# EAGLE board AT261ALDO_board (EAGLE 6.3)
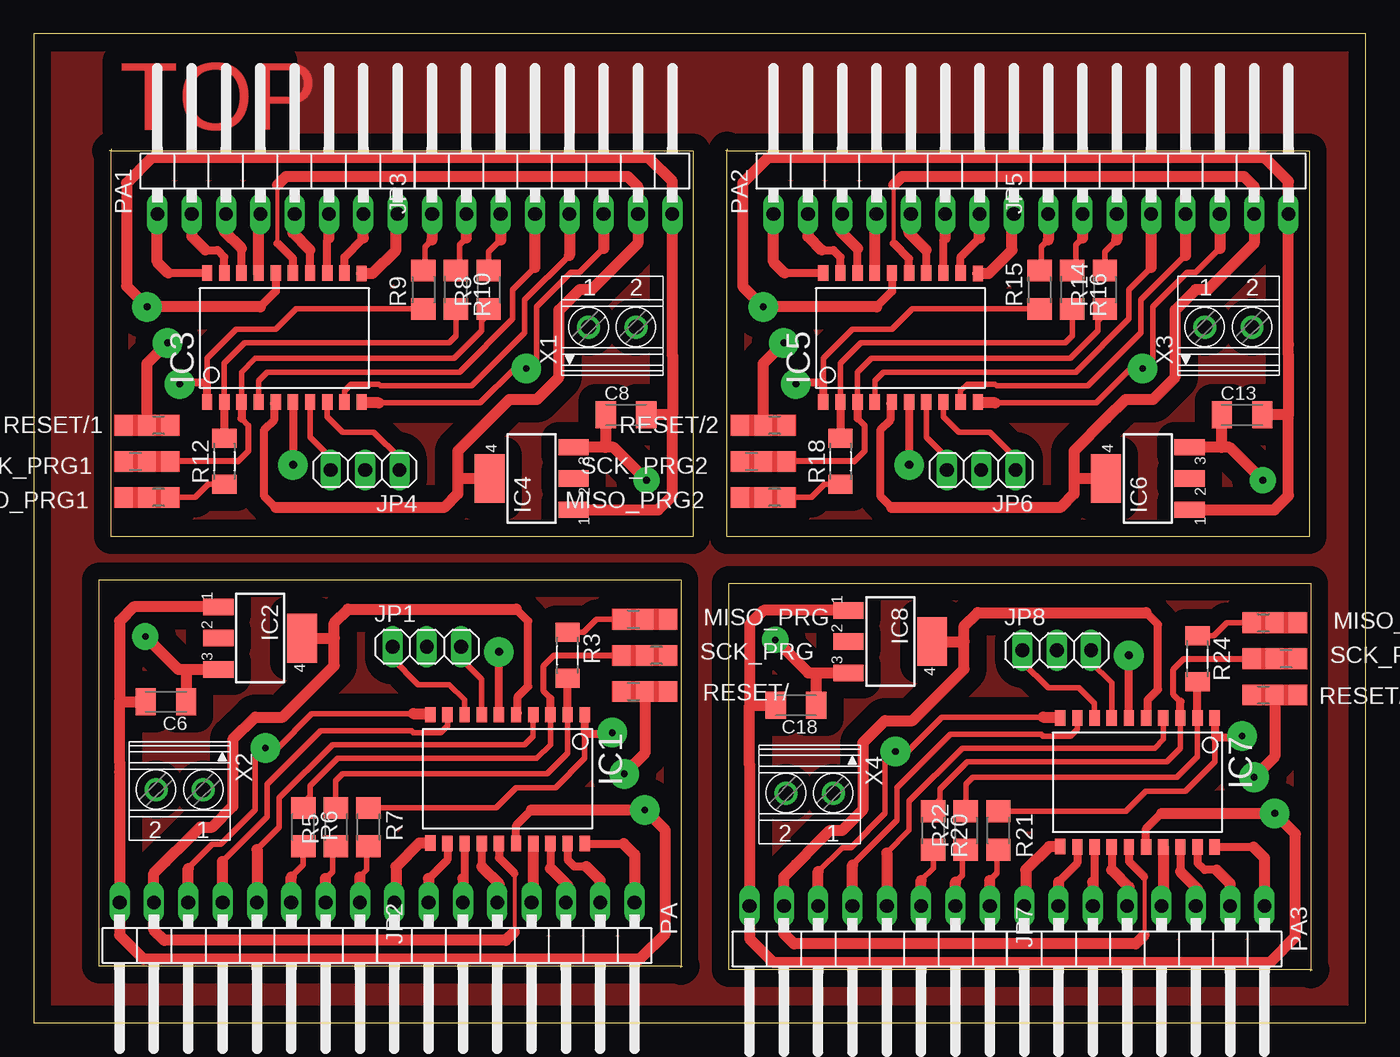
[diagram p0: board, top side]
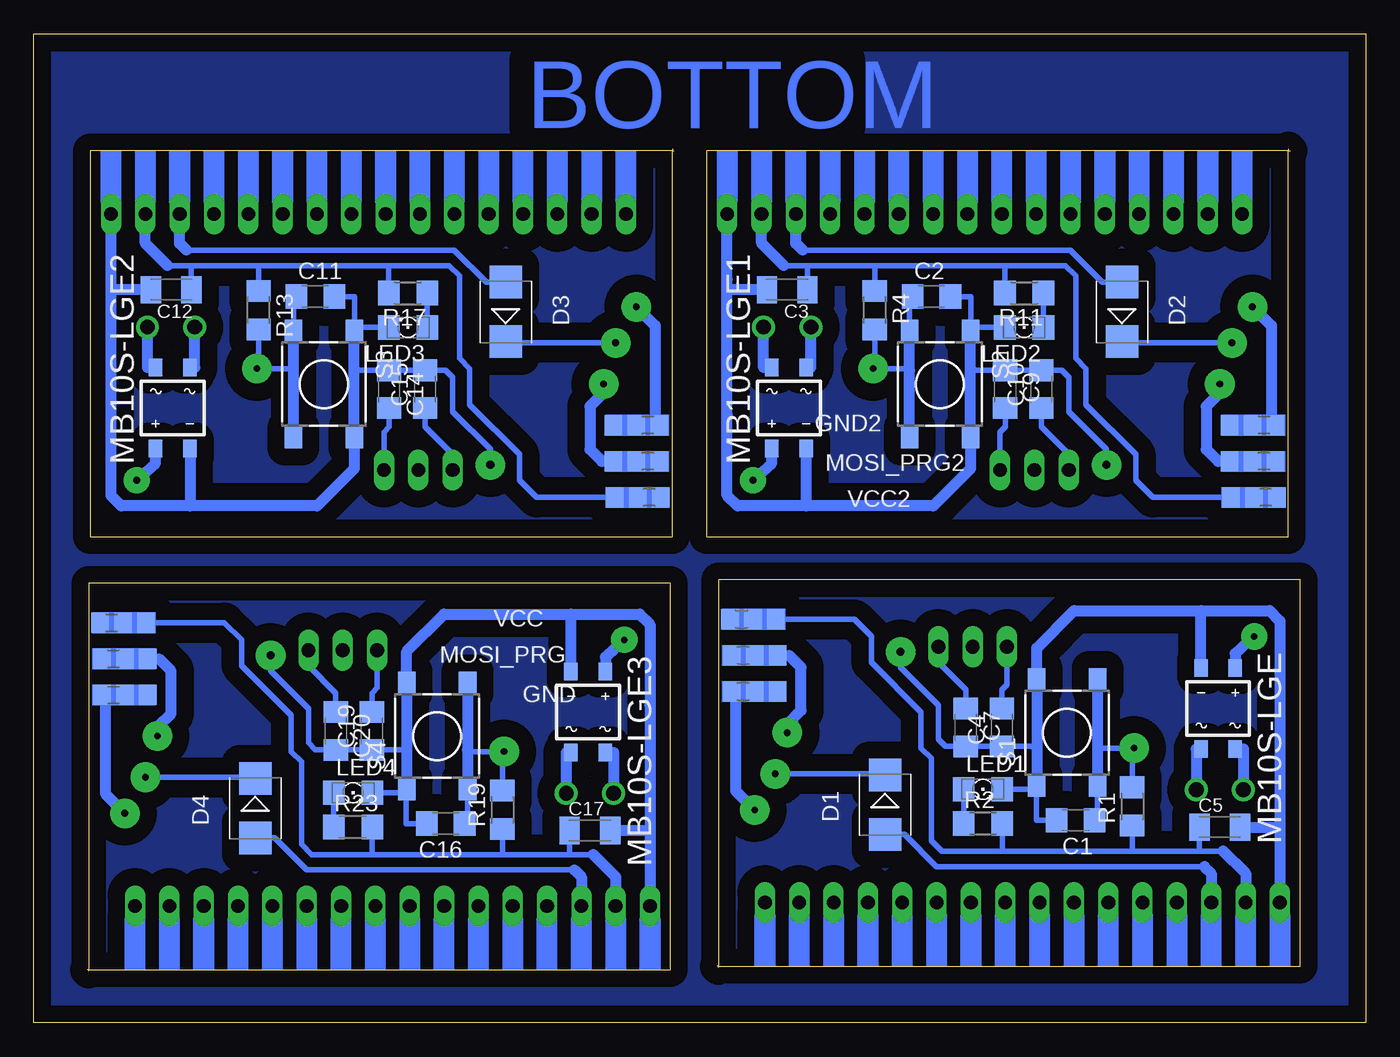
[diagram p1: board, bottom side, seen from below]

Size 98.55 x 73.15 mm. Coordinates in mm from the lower left corner, seen from the top.
Outline: 47.88,4.06 47.88,4.19
Outline: 47.88,4.19 4.83,4.19 4.83,32.77 47.88,32.77 47.88,4.19
Outline: 47.88,4.19 48.01,4.19
Outline: 5.71,64.64 5.71,64.52
Outline: 5.71,64.52 48.77,64.52 48.77,35.94 5.71,35.94 5.71,64.52
Outline: 5.71,64.52 5.59,64.52
Outline: 51.31,64.64 51.31,64.52
Outline: 51.31,64.52 94.36,64.52 94.36,35.94 51.31,35.94 51.31,64.52
Outline: 51.31,64.52 51.18,64.52
Outline: 94.49,3.81 94.49,3.94
Outline: 94.49,3.94 51.44,3.94 51.44,32.51 94.49,32.51 94.49,3.94
Outline: 94.49,3.94 94.61,3.94
Outline: 0,0 98.55,0 98.55,73.15 0,73.15 0,0
Copper layers (1*16): Top 0.035mm / dielectric 1.5mm / Bottom 0.035mm
Design rules "default": minimum track width 10mil, minimum drill 24mil, track to track 8mil, track to pad 8mil, pad to pad 8mil, via to via 8mil, smd to smd 8mil, copper to edge 40mil, drill to drill 8mil, minimum pad ring 10mil, minimum via ring 8mil, stop-mask expansion 4mil, vias tented up to drill 0mil, thermal gap 10mil

## Footprints (pad centres in the part's own frame; a part is rotated, then mirrored left to right if it is on the bottom)
C1206 = smd 1.6 x 1.8: 1 -1.4,0; 2 1.4,0
C1206K = smd 1.5 x 2: 1 -1.5,0; 2 1.5,0
SMB = smd 2.4 x 2.4: A 2.2,0; C -2.2,0
A0R-JMP = smd 1.5 x 1.3: 1 0,1.7; 2 0,0; 3 0,-1.7
SO20L = smd 0.762 x 1.143: 1 -5.08,-5.131; 2 -3.81,-5.131; 3 -2.54,-5.131; 4 -1.27,-5.131; 5 0,-5.131; 6 1.27,-5.131; 7 2.54,-5.131; 8 3.81,-5.131; 9 5.08,-5.131; 10 6.35,-5.131; 11 6.35,4.369; 12 5.08,4.394; 13 3.81,4.394; 14 2.54,4.394; 15 1.27,4.394; 16 0,4.394; 17 -1.27,4.394; 18 -2.54,4.394; 19 -3.81,4.394; 20 -5.08,4.394
SOT223 = smd 1.219 x 2.235: 1 -2.311,-3.099; 2 0,-3.099; 3 2.311,-3.099 | smd 3.6 x 2.2: 4 0,3.099
1X03 = drill 1.016 long: 1 -2.54,0; 2 0,0; 3 2.54,0
1X08/90 = drill 1.016 long: 1 -8.89,-3.81; 2 -6.35,-3.81; 3 -3.81,-3.81; 4 -1.27,-3.81; 5 1.27,-3.81; 6 3.81,-3.81; 7 6.35,-3.81; 8 8.89,-3.81
1206 = smd 1.6 x 1.803: A -1.422,0; C 1.422,0
MBS = smd 1 x 1.3: + -1.27,-3; - 1.27,-3; AC1 -1.27,3; AC2 1.27,3
R1206 = smd 1.6 x 1.803: 1 -1.422,0; 2 1.422,0
M1406 = smd 1.4 x 1.8: 1 -1.7,0; 2 1.7,0
DTSM-6 = smd 1.55 x 1.3: 1 -3.975,2.25; 2 3.975,2.25; 3 -3.975,-2.25; 4 3.975,-2.25
1751248 = drill 1.1 pad 1.7: 1 -1.75,-0.1; 2 1.75,-0.1

## Placement (x,y rotation side)
C1  100n  [C1206]  21.46,14.99 180 bottom
C2  100n  [C1206]  32.13,53.72 0 bottom
C3  10uTantal  [C1206K]  42.8,54.23 180 bottom
C4  33p  [C1206]  26.92,21.84 90 bottom
C5  10uTantal  [C1206K]  10.79,14.48 0 bottom
C6  10u/20VTantal  [C1206K]  9.78,23.75 180 top
C7  33p  [C1206]  29.59,21.84 270 bottom
C8  10u/20VTantal  [C1206K]  43.81,44.96 0 top
C9  33p  [C1206]  26.67,46.86 270 bottom
C10  33p  [C1206]  24,46.86 90 bottom
C11  100n  [C1206]  77.72,53.72 0 bottom
C12  10uTantal  [C1206K]  88.39,54.23 180 bottom
C13  10u/20VTantal  [C1206K]  89.41,44.96 0 top
C14  33p  [C1206]  72.26,46.86 270 bottom
C15  33p  [C1206]  69.6,46.86 90 bottom
C16  100n  [C1206]  68.07,14.73 180 bottom
C17  10uTantal  [C1206K]  57.4,14.22 0 bottom
C18  10u/20VTantal  [C1206K]  56.39,23.5 180 top
C19  33p  [C1206]  73.53,21.59 90 bottom
C20  33p  [C1206]  76.2,21.59 270 bottom
D1  4148  [SMB]  35.56,16.13 270 bottom
D2  4148  [SMB]  18.03,52.58 90 bottom
D3  4148  [SMB]  63.63,52.58 90 bottom
D4  4148  [SMB]  82.17,15.88 270 bottom
GND  0R-JUMPA  [A0R-JMP]  45.21,24.51 90 bottom
GND1  0R-JUMPA  [A0R-JMP]  8.38,44.2 270 bottom
GND2  0R-JUMPA  [A0R-JMP]  53.98,44.2 270 bottom
GND3  0R-JUMPA  [A0R-JMP]  91.82,24.26 90 bottom
IC1  TINY26LS  [SO20L]  35.69,17.65 180 top
IC2  317EMP  [SOT223]  16.76,28.45 270 top
IC3  TINY26LS  [SO20L]  17.91,51.05 0 top
IC4  317EMP  [SOT223]  36.83,40.26 90 top
IC5  TINY26LS  [SO20L]  63.5,51.05 0 top
IC6  317EMP  [SOT223]  82.42,40.26 90 top
IC7  TINY26LS  [SO20L]  82.3,17.4 180 top
IC8  317EMP  [SOT223]  63.37,28.19 270 top
JP1  [1X03]  29.08,27.81 0 top
JP2  [1X08/90]  15.24,5.08 180 top
JP3  [1X08/90]  38.35,63.63 0 top
JP4  [1X03]  24.51,40.89 180 top
JP5  [1X08/90]  83.95,63.63 0 top
JP6  [1X03]  70.1,40.89 180 top
JP7  [1X08/90]  61.85,4.83 180 top
JP8  [1X03]  75.69,27.56 0 top
LED1  [1206]  28.32,17.27 0 bottom
LED2  [1206]  25.27,51.44 180 bottom
LED3  [1206]  70.87,51.44 180 bottom
LED4  [1206]  74.93,17.02 0 bottom
MB10S-LGE  B10S  [MBS]  10.92,23.24 180 bottom
MB10S-LGE1  B10S  [MBS]  42.67,45.47 0 bottom
MB10S-LGE2  B10S  [MBS]  88.27,45.47 0 bottom
MB10S-LGE3  B10S  [MBS]  57.53,22.99 180 bottom
MISO_PRG  0R-JUMPA  [A0R-JMP]  45.21,29.84 90 top
MISO_PRG1  0R-JUMPA  [A0R-JMP]  8.38,38.86 270 top
MISO_PRG2  0R-JUMPA  [A0R-JMP]  53.98,38.86 270 top
MISO_PRG3  0R-JUMPA  [A0R-JMP]  91.82,29.59 90 top
MOSI_PRG  0R-JUMPA  [A0R-JMP]  45.21,27.18 90 bottom
MOSI_PRG1  0R-JUMPA  [A0R-JMP]  8.38,41.53 270 bottom
MOSI_PRG2  0R-JUMPA  [A0R-JMP]  53.98,41.53 270 bottom
MOSI_PRG3  0R-JUMPA  [A0R-JMP]  91.82,26.92 90 bottom
PA  [1X08/90]  35.56,5.08 180 top
PA1  [1X08/90]  18.03,63.63 0 top
PA2  [1X08/90]  63.63,63.63 0 top
PA3  [1X08/90]  82.17,4.83 180 top
R1  10k  [R1206]  17.27,16 90 bottom
R2  1k  [R1206]  28.32,14.73 0 bottom
R3  0R  [M1406]  39.5,27.18 270 top
R4  10k  [R1206]  36.32,52.7 270 bottom
R5  4k7  [R1206]  22.35,14.48 90 top
R6  4k7  [R1206]  19.94,14.48 270 top
R7  4k7  [R1206]  24.77,14.48 270 top
R8  4k7  [R1206]  33.66,54.23 90 top
R9  4k7  [R1206]  28.83,54.23 90 top
R10  4k7  [R1206]  31.24,54.23 270 top
R11  1k  [R1206]  25.27,53.98 180 bottom
R12  0R  [M1406]  14.1,41.53 90 top
R13  10k  [R1206]  81.92,52.7 270 bottom
R14  4k7  [R1206]  79.25,54.23 90 top
R15  4k7  [R1206]  74.42,54.23 90 top
R16  4k7  [R1206]  76.83,54.23 270 top
R17  1k  [R1206]  70.87,53.98 180 bottom
R18  0R  [M1406]  59.69,41.53 90 top
R19  10k  [R1206]  63.88,15.75 90 bottom
R20  4k7  [R1206]  66.55,14.22 270 top
R21  4k7  [R1206]  71.37,14.22 270 top
R22  4k7  [R1206]  68.96,14.22 90 top
R23  1k  [R1206]  74.93,14.48 0 bottom
R24  0R  [M1406]  86.11,26.92 270 top
RESET/  0R-JUMPA  [A0R-JMP]  45.21,24.51 90 top
RESET/1  0R-JUMPA  [A0R-JMP]  8.38,44.2 270 top
RESET/2  0R-JUMPA  [A0R-JMP]  53.98,44.2 270 top
RESET/3  0R-JUMPA  [A0R-JMP]  91.82,24.26 90 top
S1  DTSM-6  [DTSM-6]  22.1,21.46 90 bottom
S2  DTSM-6  [DTSM-6]  31.5,47.24 270 bottom
S3  DTSM-6  [DTSM-6]  77.09,47.24 270 bottom
S4  DTSM-6  [DTSM-6]  68.71,21.21 90 bottom
SCK_PRG  0R-JUMPA  [A0R-JMP]  45.21,27.18 270 top
SCK_PRG1  0R-JUMPA  [A0R-JMP]  8.38,41.53 90 top
SCK_PRG2  0R-JUMPA  [A0R-JMP]  53.98,41.53 90 top
SCK_PRG3  0R-JUMPA  [A0R-JMP]  91.82,26.92 270 top
VCC  0R-JUMPA  [A0R-JMP]  45.34,29.84 90 bottom
VCC1  0R-JUMPA  [A0R-JMP]  8.26,38.86 270 bottom
VCC2  0R-JUMPA  [A0R-JMP]  53.85,38.86 270 bottom
VCC3  0R-JUMPA  [A0R-JMP]  91.95,29.59 90 bottom
X1  1751248  [1751248]  42.8,51.56 0 top
X2  1751248  [1751248]  10.79,17.14 180 top
X3  1751248  [1751248]  88.39,51.56 0 top
X4  1751248  [1751248]  57.4,16.89 180 top

## Library data of the parts
C1-C20 R1 R4-R10 R13-R16 R19-R22 = rcl
D1-D4 = diode
GND GND1-GND3 MISO_PRG MISO_PRG1-MISO_PRG3 MOSI_PRG MOSI_PRG1-MOSI_PRG3 RESET/ RESET/1-RESET/3 SCK_PRG SCK_PRG1-SCK_PRG3 VCC VCC1-VCC3 = jump-0r-smd
IC1 IC3 IC5 IC7 = atmel; MPN: ATTINY26L-8SU; OC_FARNELL: 9171665; OC_NEWARK: 01M6921
IC2 IC4 IC6 IC8 = linear
JP1-JP8 PA PA1-PA3 = pinhead
LED1-LED4 = led
MB10S-LGE MB10S-LGE1-MB10S-LGE3 = rectifier
R2 R3 R11 R12 R17 R18 R23 R24 = resistor
S1-S4 = switch-tact
X1-X4 = con-phoenix-350; OC_FARNELL: unknown; OC_NEWARK: unknown

## Nets
GND: C1.2 C4.1 C5.2 C6.2 C7.2 GND.2 IC1.6 IC1.16 IC2.1 JP2.8 LED1.C MB10S-LGE.- S1.1 S1.2
GND1: C2.2 C3.2 C8.2 C9.1 C10.2 GND1.2 IC3.6 IC3.16 IC4.1 JP3.8 LED2.C MB10S-LGE1.- S2.1 S2.2
GND2: C11.2 C12.2 C13.2 C14.1 C15.2 GND2.2 IC5.6 IC5.16 IC6.1 JP5.8 LED3.C MB10S-LGE2.- S3.1 S3.2
GND3: C16.2 C17.2 C18.2 C19.1 C20.2 GND3.2 IC7.6 IC7.16 IC8.1 JP7.8 LED4.C MB10S-LGE3.- S4.1 S4.2
MISO: JP2.2 R5.1
MISO1: JP3.2 R10.1
MISO2: JP5.2 R16.1
MISO3: JP7.2 R22.1
MISO_JUMP_RES: MISO_PRG.2 R3.1
MISO_JUMP_RES1: MISO_PRG1.2 R12.1
MISO_JUMP_RES2: MISO_PRG2.2 R18.1
MISO_JUMP_RES3: MISO_PRG3.2 R24.1
MISO_PRG: IC1.2 R3.2 R5.2
MISO_PRG1: IC3.2 R10.2 R12.2
MISO_PRG2: IC5.2 R16.2 R18.2
MISO_PRG3: IC7.2 R22.2 R24.2
MOSI: JP2.1 R7.2
MOSI1: JP3.1 R9.2
MOSI2: JP5.1 R15.2
MOSI3: JP7.1 R21.2
MOSI_PRG: IC1.1 MOSI_PRG.2 R7.1
MOSI_PRG1: IC3.1 MOSI_PRG1.2 R9.1
MOSI_PRG2: IC5.1 MOSI_PRG2.2 R15.1
MOSI_PRG3: IC7.1 MOSI_PRG3.2 R21.1
N$1: C4.2 IC1.8 JP1.1
N$2: C9.2 IC3.8 JP4.1
N$3: C7.1 IC1.7 JP1.3
N$4: LED1.A R2.1
N$5: C10.1 IC3.7 JP4.3
N$6: LED2.A R11.1
N$7: C14.2 IC5.8 JP6.1
N$8: C15.1 IC5.7 JP6.3
N$9: LED3.A R17.1
N$10: C19.2 IC7.8 JP8.1
N$11: C20.1 IC7.7 JP8.3
N$12: LED4.A R23.1
PA0: IC1.20 PA.1
PA1: IC1.19 PA.2
PA2: IC1.18 PA.3
PA3: IC1.17 PA.4
PA4: IC1.14 PA.5
PA5: IC1.13 PA.6
PA6: IC1.12 PA.7
PA7: IC1.11 PA.8
PA8: IC3.20 PA1.1
PA9: IC3.19 PA1.2
PA10: IC3.18 PA1.3
PA11: IC3.17 PA1.4
PA12: IC3.14 PA1.5
PA13: IC3.13 PA1.6
PA14: IC3.12 PA1.7
PA15: IC3.11 PA1.8
PA16: IC5.20 PA2.1
PA17: IC5.19 PA2.2
PA18: IC5.18 PA2.3
PA19: IC5.17 PA2.4
PA20: IC5.14 PA2.5
PA21: IC5.13 PA2.6
PA22: IC5.12 PA2.7
PA23: IC5.11 PA2.8
PA24: IC7.20 PA3.1
PA25: IC7.19 PA3.2
PA26: IC7.18 PA3.3
PA27: IC7.17 PA3.4
PA28: IC7.14 PA3.5
PA29: IC7.13 PA3.6
PA30: IC7.12 PA3.7
PA31: IC7.11 PA3.8
PB1: IC3.4 JP3.4
PB2: IC3.9 JP3.5
PB3: IC1.4 JP2.4
PB4: C2.1 D2.A IC3.10 JP3.6 R4.2 S2.3 S2.4
PB5: IC5.4 JP5.4
PB6: IC1.9 JP2.5
PB7: C1.1 D1.A IC1.10 JP2.6 R1.2 S1.3 S1.4
PB8: IC5.9 JP5.5
PB9: C11.1 D3.A IC5.10 JP5.6 R13.2 S3.3 S3.4
PB10: IC7.4 JP7.4
PB11: IC7.9 JP7.5
PB12: C16.1 D4.A IC7.10 JP7.6 R19.2 S4.3 S4.4
RESET: D1.C RESET/.2
RESET1: D2.C RESET/1.2
RESET2: D3.C RESET/2.2
RESET3: D4.C RESET/3.2
SCK: JP2.3 R6.2
SCK1: JP3.3 R8.2
SCK2: JP5.3 R14.2
SCK3: JP7.3 R20.2
SCK_PRG: IC1.3 R6.1 SCK_PRG.2
SCK_PRG1: IC3.3 R8.1 SCK_PRG1.2
SCK_PRG2: IC5.3 R14.1 SCK_PRG2.2
SCK_PRG3: IC7.3 R20.1 SCK_PRG3.2
VCC: C5.1 IC1.5 IC1.15 IC2.4 JP2.7 R1.1 R2.2 VCC.2
VCC1: C3.1 IC3.5 IC3.15 IC4.4 JP3.7 R4.1 R11.2 VCC1.2
VCC2: C12.1 IC5.5 IC5.15 IC6.4 JP5.7 R13.1 R17.2 VCC2.2
VCC3: C17.1 IC7.5 IC7.15 IC8.4 JP7.7 R19.1 R23.2 VCC3.2
VIN_A: MB10S-LGE.AC1 X2.2
VIN_A1: MB10S-LGE1.AC1 X1.2
VIN_A2: MB10S-LGE2.AC1 X3.2
VIN_A3: MB10S-LGE3.AC1 X4.2
VIN_B: MB10S-LGE.AC2 X2.1
VIN_B1: MB10S-LGE1.AC2 X1.1
VIN_B2: MB10S-LGE2.AC2 X3.1
VIN_B3: MB10S-LGE3.AC2 X4.1
VIN_PLUS: C6.1 IC2.3 MB10S-LGE.+
VIN_PLUS1: C8.1 IC4.3 MB10S-LGE1.+
VIN_PLUS2: C13.1 IC6.3 MB10S-LGE2.+
VIN_PLUS3: C18.1 IC8.3 MB10S-LGE3.+

## Tracks (layer width: path | path; a pad name or v marks a point on that pad's centre or on a via)
GND  (via drill 0.5 pad 2.18, 0.6 pad 2.18)
  Top 0.406: 6.38,18.57 6.35,18.54 | 6.48,19.43 6.35,19.3
  Top 0.61: IC1.16 35.69,14.61 36.83,15.75 | IC1.6 v34.42,27.43
  Top 0.813: 36.83,15.75 v45.21,15.75 46.74,14.22 46.74,6.6 44.83,4.7 8.13,4.7 6.35,6.48 JP2.8 6.35,18.54 6.35,19.3 6.35,23.75 | 6.35,23.75 C6.2 | IC2.1 7.39,30.76 6.35,29.72 6.35,23.75
  Bottom 0.254: JP2.8 6.35,12.83
  Bottom 0.406: 6.48,23.88 6.35,23.75 | 6.4,13.76 6.35,13.72 | S1.1 24.6,17.74 23.94,17.08 | S1.1 24.38,17.45 24.38,14.99 C1.2 | v34.42,27.43 34.42,26.29 31.62,23.5 31.62,20.95 31.11,20.44 C7.2 C4.1 24.47,20.44 24.35,20.32 | LED1.C 24.56,17.27 S1.1
  Bottom 0.813: 6.35,14.48 6.35,23.75 6.35,29.72 7.11,30.48 12.19,30.48 | 6.35,14.48 6.35,13.72 JP2.8 | S1.1 24.35,20.32 S1.2 24.35,27.72 21.59,30.48 12.19,30.48 | MB10S-LGE.- 12.19,30.48 | C5.2 6.35,14.48 | v45.21,15.75 46.61,17.14 46.61,24.38 46.48,24.51 GND.2
GND1  (via drill 0.5 pad 2.18, 0.6 pad 2.18)
  Top 0.406: 47.22,50.14 47.24,50.16 | 47.12,49.28 47.24,49.4
  Top 0.61: IC3.16 17.91,54.1 16.76,52.96 | IC3.6 v19.18,41.27
  Top 0.813: 16.76,52.96 v8.38,52.96 6.86,54.48 6.86,62.1 8.76,64.01 45.47,64.01 47.24,62.23 JP3.8 47.24,50.16 47.24,49.4 47.24,44.96 | 47.24,44.96 C8.2 | IC4.1 46.2,37.95 47.24,38.99 47.24,44.96
  Bottom 0.254: JP3.8 47.24,55.88
  Bottom 0.406: 47.12,44.83 47.24,44.96 | 47.2,54.94 47.24,54.99 | S2.1 28.99,50.96 29.65,51.63 | S2.1 29.21,51.26 29.21,53.72 C2.2 | v19.18,41.27 19.18,42.42 21.97,45.21 21.97,47.75 22.48,48.26 C10.2 C9.1 29.12,48.26 29.25,48.39 | LED2.C 29.03,51.44 S2.1
  Bottom 0.813: 47.24,54.23 47.24,44.96 47.24,38.99 46.48,38.23 41.4,38.23 | 47.24,54.23 47.24,54.99 JP3.8 | S2.1 29.25,48.39 S2.2 29.25,40.98 32,38.23 41.4,38.23 | MB10S-LGE1.- 41.4,38.23 | C3.2 47.24,54.23 | v8.38,52.96 6.99,51.56 6.99,44.32 7.11,44.2 GND1.2
GND2  (via drill 0.5 pad 2.18, 0.6 pad 2.18)
  Top 0.406: 92.81,50.14 92.84,50.16 | 92.71,49.28 92.84,49.4
  Top 0.61: IC5.16 63.5,54.1 62.36,52.96 | IC5.6 v64.77,41.27
  Top 0.813: 62.36,52.96 v53.98,52.96 52.45,54.48 52.45,62.1 54.36,64.01 91.06,64.01 92.84,62.23 JP5.8 92.84,50.16 92.84,49.4 92.84,44.96 | 92.84,44.96 C13.2 | IC6.1 91.8,37.95 92.84,38.99 92.84,44.96
  Bottom 0.254: JP5.8 92.84,55.88
  Bottom 0.406: 92.71,44.83 92.84,44.96 | 92.79,54.94 92.84,54.99 | S3.1 74.58,50.96 75.25,51.63 | S3.1 74.8,51.26 74.8,53.72 C11.2 | v64.77,41.27 64.77,42.42 67.56,45.21 67.56,47.75 68.08,48.26 C15.2 C14.1 74.72,48.26 74.84,48.39 | LED3.C 74.62,51.44 S3.1
  Bottom 0.813: 92.84,54.23 92.84,44.96 92.84,38.99 92.08,38.23 87,38.23 | 92.84,54.23 92.84,54.99 JP5.8 | S3.1 74.84,48.39 S3.2 74.84,40.98 77.6,38.23 87,38.23 | MB10S-LGE2.- 87,38.23 | C12.2 92.84,54.23 | v53.98,52.96 52.58,51.56 52.58,44.32 52.7,44.2 GND2.2
GND3  (via drill 0.5 pad 2.18, 0.6 pad 2.18)
  Top 0.406: 52.98,18.31 52.96,18.29 | 53.09,19.18 52.96,19.05
  Top 0.61: IC7.16 82.3,14.35 83.44,15.49 | IC7.6 v81.03,27.18
  Top 0.813: 83.44,15.49 v91.82,15.49 93.34,13.97 93.34,6.35 91.44,4.45 54.74,4.45 52.96,6.22 JP7.8 52.96,18.29 52.96,19.05 52.96,23.5 | 52.96,23.5 C18.2 | IC8.1 54,30.5 52.96,29.46 52.96,23.5
  Bottom 0.254: JP7.8 52.96,12.57
  Bottom 0.406: 53.09,23.62 52.96,23.5 | 53.01,13.51 52.96,13.46 | S4.1 71.21,17.49 70.55,16.83 | S4.1 70.99,17.2 70.99,14.73 C16.2 | v81.03,27.18 81.03,26.04 78.23,23.24 78.23,20.7 77.72,20.19 C20.2 C19.1 71.08,20.19 70.96,20.07 | LED4.C 71.17,17.02 S4.1
  Bottom 0.813: 52.96,14.22 52.96,23.5 52.96,29.46 53.72,30.23 58.8,30.23 | 52.96,14.22 52.96,13.46 JP7.8 | S4.1 70.96,20.07 S4.2 70.96,27.47 68.2,30.23 58.8,30.23 | MB10S-LGE3.- 58.8,30.23 | C17.2 52.96,14.22 | v91.82,15.49 93.22,16.89 93.22,24.13 93.09,24.26 GND3.2
MISO
  Top 0.254: 22.1,12.17 R5.1
  Top 0.406: 21.59,10.67 22.1,11.18 22.1,12.17
  Top 0.813: JP2.2 21.59,10.67
MISO1
  Top 0.254: 31.5,56.54 R10.1
  Top 0.406: 32,58.04 31.5,57.53 31.5,56.54
  Top 0.813: JP3.2 32,58.04
MISO2
  Top 0.254: 77.09,56.54 R16.1
  Top 0.406: 77.6,58.04 77.09,57.53 77.09,56.54
  Top 0.813: JP5.2 77.6,58.04
MISO3
  Top 0.254: 68.71,11.91 R22.1
  Top 0.406: 68.2,10.41 68.71,10.92 68.71,11.91
  Top 0.813: JP7.2 68.2,10.41
MISO_JUMP_RES
  Top 0.406: R3.1 40.69,28.88 41.66,29.84 MISO_PRG.2
MISO_JUMP_RES1
  Top 0.406: R12.1 12.9,39.83 11.94,38.86 MISO_PRG1.2
MISO_JUMP_RES2
  Top 0.406: R18.1 58.5,39.83 57.53,38.86 MISO_PRG2.2
MISO_JUMP_RES3
  Top 0.406: R24.1 87.3,28.62 88.27,29.59 MISO_PRG3.2
MISO_PRG
  Top 0.406: IC1.2 39.5,19.94 37.97,18.41 22.86,18.41 22.35,17.91 R5.2
  Top 0.61: IC1.2 R3.2
MISO_PRG1
  Top 0.406: IC3.2 14.1,48.77 15.62,50.29 30.73,50.29 31.24,50.8 R10.2
  Top 0.61: IC3.2 R12.2
MISO_PRG2
  Top 0.406: IC5.2 59.69,48.77 61.21,50.29 76.33,50.29 76.83,50.8 R16.2
  Top 0.61: IC5.2 R18.2
MISO_PRG3
  Top 0.406: IC7.2 86.11,19.68 84.58,18.16 69.47,18.16 68.96,17.65 R22.2
  Top 0.61: IC7.2 R24.2
MOSI
  Top 0.254: 24.64,12.17 R7.2
  Top 0.406: 24.13,10.79 24.64,11.3 24.64,12.17
  Top 0.813: JP2.1 24.13,10.79
MOSI1
  Top 0.254: 28.96,56.54 R9.2
  Top 0.406: 29.46,57.91 28.96,57.4 28.96,56.54
  Top 0.813: JP3.1 29.46,57.91
MOSI2
  Top 0.254: 74.55,56.54 R15.2
  Top 0.406: 75.06,57.91 74.55,57.4 74.55,56.54
  Top 0.813: JP5.1 75.06,57.91
MOSI3
  Top 0.254: 71.25,11.91 R21.2
  Top 0.406: 70.74,10.54 71.25,11.05 71.25,11.91
  Top 0.813: JP7.1 70.74,10.54
MOSI_PRG  (via drill 0.5 pad 2.18)
  Top 0.406: 40.77,21.34 40.77,19.56 38.61,17.4 35.69,17.4 34.19,15.9 R7.1 | 40.84,22.86 IC1.1 | v42.8,21.46 42.67,21.34
  Top 0.61: IC1.1 40.77,21.34 42.67,21.34
  Bottom 0.406: MOSI_PRG.2 42.67,27.18 | 42.8,22.1 v42.8,21.46
  Bottom 0.813: 42.67,27.18 41.78,26.29 41.78,23.11 42.8,22.1
MOSI_PRG1  (via drill 0.5 pad 2.18)
  Top 0.406: 12.83,47.37 12.83,49.15 14.99,51.31 17.91,51.31 19.41,52.81 R9.1 | 12.75,45.85 IC3.1 | v10.79,47.24 10.92,47.37
  Top 0.61: IC3.1 12.83,47.37 10.92,47.37
  Bottom 0.406: MOSI_PRG1.2 10.92,41.53 | 10.79,46.61 v10.79,47.24
  Bottom 0.813: 10.92,41.53 11.81,42.42 11.81,45.59 10.79,46.61
MOSI_PRG2  (via drill 0.5 pad 2.18)
  Top 0.406: 58.42,47.37 58.42,49.15 60.58,51.31 63.5,51.31 65,52.81 R15.1 | 58.34,45.85 IC5.1 | v56.39,47.24 56.52,47.37
  Top 0.61: IC5.1 58.42,47.37 56.52,47.37
  Bottom 0.406: MOSI_PRG2.2 56.52,41.53 | 56.39,46.61 v56.39,47.24
  Bottom 0.813: 56.52,41.53 57.4,42.42 57.4,45.59 56.39,46.61
MOSI_PRG3  (via drill 0.5 pad 2.18)
  Top 0.406: 87.38,21.08 87.38,19.3 85.22,17.14 82.3,17.14 80.8,15.65 R21.1 | 87.45,22.61 IC7.1 | v89.41,21.21 89.28,21.08
  Top 0.61: IC7.1 87.38,21.08 89.28,21.08
  Bottom 0.406: MOSI_PRG3.2 89.28,26.92 | 89.41,21.84 v89.41,21.21
  Bottom 0.813: 89.28,26.92 88.39,26.04 88.39,22.86 89.41,21.84
N$1
  Top 0.406: IC1.8 31.88,23.88 30.73,25.02 28.45,25.02 26.54,26.92 JP1.1
  Bottom 0.406: JP1.1 26.54,25.02 26.92,24.64 C4.2
N$2
  Top 0.406: IC3.8 21.72,44.83 22.86,43.69 25.15,43.69 27.05,41.78 JP4.1
  Bottom 0.406: JP4.1 27.05,43.69 26.67,44.07 C9.2
N$3
  Top 0.406: IC1.7 33.15,25.4 31.62,26.92 JP1.3
  Bottom 0.406: JP1.3 31.62,26.67 29.59,24.64 C7.1
N$4
  Bottom 0.406: LED1.A R2.1
N$5
  Top 0.406: IC3.7 20.45,43.31 21.97,41.78 JP4.3
  Bottom 0.406: JP4.3 21.97,42.04 24,44.07 C10.1
N$6
  Bottom 0.406: LED2.A R11.1
N$7
  Top 0.406: IC5.8 67.31,44.83 68.45,43.69 70.74,43.69 72.64,41.78 JP6.1
  Bottom 0.406: JP6.1 72.64,43.69 72.26,44.07 C14.2
N$8
  Top 0.406: IC5.7 66.04,43.31 67.56,41.78 JP6.3
  Bottom 0.406: JP6.3 67.56,42.04 69.6,44.07 C15.1
N$9
  Bottom 0.406: LED3.A R17.1
N$10
  Top 0.406: IC7.8 78.49,23.62 77.34,24.77 75.06,24.77 73.15,26.67 JP8.1
  Bottom 0.406: JP8.1 73.15,24.77 73.53,24.38 C19.2
N$11
  Top 0.406: IC7.7 79.76,25.15 78.23,26.67 JP8.3
  Bottom 0.406: JP8.3 78.23,26.42 76.2,24.38 C20.1
N$12
  Bottom 0.406: LED4.A R23.1
PA0
  Top 0.406: PA.1 44.45,10.03
  Top 0.61: IC1.20 43.64,13.26
  Top 0.813: 43.64,13.26 44.45,12.45 PA.1
PA1
  Top 0.61: IC1.19 39.5,12.06 40.01,11.56 40.89,11.56
  Top 0.813: PA.2 41.91,10.54 40.89,11.56
PA2
  Top 0.61: IC1.18 38.23,11.43
  Top 0.813: PA.3 39.5,9.02 39.5,10.16 38.23,11.43
PA3
  Top 0.406: 36.96,9.02 PA.4
  Top 0.813: IC1.17 36.96,9.02
PA4
  Top 0.254: 34.42,10.41 34.42,10.29
  Top 0.406: 34.42,9.02 PA.5
  Top 0.61: IC1.14 33.15,11.56
  Top 0.813: 34.42,9.02 34.42,10.29 33.15,11.56
PA5
  Top 0.254: 31.75,9.78 PA.6
  Top 0.305: 31.88,10.79 31.75,10.67
  Top 0.61: IC1.13 31.88,10.79
  Top 0.813: 31.75,10.67 PA.6
PA6
  Top 0.61: IC1.12 30.61,12.06 29.21,10.67
  Top 0.813: 29.21,10.67 PA.7
PA7
  Top 0.254: 26.8,10.67 26.8,9.02
  Top 0.305: 26.8,9.02 PA.8
  Top 0.813: IC1.11 28.52,13.28 26.8,11.56 26.8,9.02
PA8
  Top 0.406: PA1.1 9.14,58.67
  Top 0.61: IC3.20 9.96,55.45
  Top 0.813: 9.96,55.45 9.14,56.26 PA1.1
PA9
  Top 0.61: IC3.19 14.1,56.64 13.59,57.15 12.7,57.15
  Top 0.813: PA1.2 11.68,58.17 12.7,57.15
PA10
  Top 0.61: IC3.18 15.37,57.28
  Top 0.813: PA1.3 14.1,59.69 14.1,58.55 15.37,57.28
PA11
  Top 0.406: 16.64,59.69 PA1.4
  Top 0.813: IC3.17 16.64,59.69
PA12
  Top 0.254: 19.18,58.29 19.18,58.42
  Top 0.406: 19.18,59.69 PA1.5
  Top 0.61: IC3.14 20.45,57.15
  Top 0.813: 19.18,59.69 19.18,58.42 20.45,57.15
PA13
  Top 0.254: 21.84,58.93 PA1.6
  Top 0.305: 21.72,57.91 21.84,58.04
  Top 0.61: IC3.13 21.72,57.91
  Top 0.813: 21.84,58.04 PA1.6
PA14
  Top 0.61: IC3.12 22.99,56.64 24.38,58.04
  Top 0.813: 24.38,58.04 PA1.7
PA15
  Top 0.254: 26.8,58.04 26.8,59.69
  Top 0.305: 26.8,59.69 PA1.8
  Top 0.813: IC3.11 25.07,55.42 26.8,57.15 26.8,59.69
PA16
  Top 0.406: PA2.1 54.74,58.67
  Top 0.61: IC5.20 55.55,55.45
  Top 0.813: 55.55,55.45 54.74,56.26 PA2.1
PA17
  Top 0.61: IC5.19 59.69,56.64 59.18,57.15 58.29,57.15
  Top 0.813: PA2.2 57.28,58.17 58.29,57.15
PA18
  Top 0.61: IC5.18 60.96,57.28
  Top 0.813: PA2.3 59.69,59.69 59.69,58.55 60.96,57.28
PA19
  Top 0.406: 62.23,59.69 PA2.4
  Top 0.813: IC5.17 62.23,59.69
PA20
  Top 0.254: 64.77,58.29 64.77,58.42
  Top 0.406: 64.77,59.69 PA2.5
  Top 0.61: IC5.14 66.04,57.15
  Top 0.813: 64.77,59.69 64.77,58.42 66.04,57.15
PA21
  Top 0.254: 67.44,58.93 PA2.6
  Top 0.305: 67.31,57.91 67.44,58.04
  Top 0.61: IC5.13 67.31,57.91
  Top 0.813: 67.44,58.04 PA2.6
PA22
  Top 0.61: IC5.12 68.58,56.64 69.98,58.04
  Top 0.813: 69.98,58.04 PA2.7
PA23
  Top 0.254: 72.39,58.04 72.39,59.69
  Top 0.305: 72.39,59.69 PA2.8
  Top 0.813: IC5.11 70.66,55.42 72.39,57.15 72.39,59.69
PA24
  Top 0.406: PA3.1 91.06,9.78
  Top 0.61: IC7.20 90.25,13.01
  Top 0.813: 90.25,13.01 91.06,12.19 PA3.1
PA25
  Top 0.61: IC7.19 86.11,11.81 86.61,11.3 87.5,11.3
  Top 0.813: PA3.2 88.52,10.29 87.5,11.3
PA26
  Top 0.61: IC7.18 84.84,11.18
  Top 0.813: PA3.3 86.11,8.76 86.11,9.91 84.84,11.18
PA27
  Top 0.406: 83.57,8.76 PA3.4
  Top 0.813: IC7.17 83.57,8.76
PA28
  Top 0.254: 81.03,10.16 81.03,10.03
  Top 0.406: 81.03,8.76 PA3.5
  Top 0.61: IC7.14 79.76,11.3
  Top 0.813: 81.03,8.76 81.03,10.03 79.76,11.3
PA29
  Top 0.254: 78.36,9.53 PA3.6
  Top 0.305: 78.49,10.54 78.36,10.41
  Top 0.61: IC7.13 78.49,10.54
  Top 0.813: 78.36,10.41 PA3.6
PA30
  Top 0.61: IC7.12 77.22,11.81 75.82,10.41
  Top 0.813: 75.82,10.41 PA3.7
PA31
  Top 0.254: 73.41,10.41 73.41,8.76
  Top 0.305: 73.41,8.76 PA3.8
  Top 0.813: IC7.11 75.13,13.03 73.41,11.3 73.41,8.76
PB1
  Top 0.406: IC3.4 16.64,47.5 17.27,48.13 31.5,48.13 35.43,52.07 35.43,54.23 37.08,55.88
  Top 0.813: 37.08,55.88 JP3.4
PB2
  Top 0.406: 39.62,56.77 36.32,53.47 36.32,51.05 32.38,47.12 25.65,47.12 25.53,47.24 23.5,47.24 22.99,46.74 IC3.9
  Top 0.813: JP3.5 39.62,56.77
PB3
  Top 0.406: IC1.4 36.96,21.21 36.32,20.57 22.1,20.57 18.16,16.64 18.16,14.48 16.51,12.83
  Top 0.813: 16.51,12.83 JP2.4
PB4  (via drill 0.5 pad 2.18)
  Top 0.254: 24.33,45.85 IC3.10
  Top 0.406: 25.53,45.85 33.02,45.85 35.56,48.39 v36.45,48.39 37.21,49.15 37.21,52.96 39.75,55.5 40.39,55.5 42.16,57.28
  Top 0.813: 25.53,45.85 24.33,45.85 | JP3.6 42.16,57.28
  Bottom 0.406: 41.66,57.15 21.84,57.15 19.47,54.78 D2.A | S2.3 33.75,53.25 C2.1 | 33.75,48.26 33.87,48.39 v36.45,48.39 36.32,48.51 R4.2
  Bottom 0.813: 41.66,57.15 42.16,57.66 JP3.6 | S2.4 33.75,48.26 S2.3
PB5
  Top 0.406: IC5.4 62.23,47.5 62.87,48.13 77.09,48.13 81.03,52.07 81.03,54.23 82.68,55.88
  Top 0.813: 82.68,55.88 JP5.4
PB6
  Top 0.406: 13.97,11.94 17.27,15.24 17.27,17.65 21.21,21.59 27.94,21.59 28.07,21.46 30.1,21.46 30.61,21.97 IC1.9
  Top 0.813: JP2.5 13.97,11.94
PB7  (via drill 0.5 pad 2.18)
  Top 0.254: 29.26,22.86 IC1.10
  Top 0.406: 28.07,22.86 20.57,22.86 18.03,20.32 v17.14,20.32 16.38,19.56 16.38,15.75 13.84,13.21 13.21,13.21 11.43,11.43
  Top 0.813: 28.07,22.86 29.26,22.86 | JP2.6 11.43,11.43
  Bottom 0.406: 11.94,11.56 31.75,11.56 34.12,13.93 D1.A | S1.3 19.85,15.46 C1.1 | 19.85,20.45 19.72,20.32 v17.14,20.32 17.27,20.19 R1.2
  Bottom 0.813: 11.94,11.56 11.43,11.05 JP2.6 | S1.4 19.85,20.45 S1.3
PB8
  Top 0.406: 85.22,56.77 81.92,53.47 81.92,51.05 77.98,47.12 71.25,47.12 71.12,47.24 69.09,47.24 68.58,46.74 IC5.9
  Top 0.813: JP5.5 85.22,56.77
PB9  (via drill 0.5 pad 2.18)
  Top 0.254: 69.93,45.85 IC5.10
  Top 0.406: 71.12,45.85 78.61,45.85 81.15,48.39 v82.04,48.39 82.8,49.15 82.8,52.96 85.34,55.5 85.98,55.5 87.76,57.28
  Top 0.813: 71.12,45.85 69.93,45.85 | JP5.6 87.76,57.28
  Bottom 0.406: 87.25,57.15 67.44,57.15 65.06,54.78 D3.A | S3.3 79.34,53.25 C11.1 | 79.34,48.26 79.47,48.39 v82.04,48.39 81.92,48.51 R13.2
  Bottom 0.813: 87.25,57.15 87.76,57.66 JP5.6 | S3.4 79.34,48.26 S3.3
PB10
  Top 0.406: IC7.4 83.57,20.95 82.93,20.32 68.71,20.32 64.77,16.38 64.77,14.22 63.12,12.57
  Top 0.813: 63.12,12.57 JP7.4
PB11
  Top 0.406: 60.58,11.68 63.88,14.99 63.88,17.4 67.82,21.34 74.55,21.34 74.68,21.21 76.71,21.21 77.22,21.72 IC7.9
  Top 0.813: JP7.5 60.58,11.68
PB12  (via drill 0.5 pad 2.18)
  Top 0.254: 75.87,22.61 IC7.10
  Top 0.406: 74.68,22.61 67.18,22.61 64.64,20.07 v63.75,20.07 62.99,19.3 62.99,15.49 60.45,12.95 59.82,12.95 58.04,11.18
  Top 0.813: 74.68,22.61 75.87,22.61 | JP7.6 58.04,11.18
  Bottom 0.406: 58.55,11.3 78.36,11.3 80.73,13.68 D4.A | S4.3 66.46,15.2 C16.1 | 66.46,20.19 66.33,20.07 v63.75,20.07 63.88,19.94 R19.2
  Bottom 0.813: 58.55,11.3 58.04,10.79 JP7.6 | S4.4 66.46,20.19 S4.3
RESET  (via drill 0.5 pad 2.18)
  Top 0.813: RESET/.2 45.21,19.94 v43.69,18.41
  Bottom 0.406: v43.69,18.41 35.65,18.41 D1.C
RESET1  (via drill 0.5 pad 2.18)
  Top 0.813: RESET/1.2 8.38,48.77 v9.91,50.29
  Bottom 0.406: v9.91,50.29 17.95,50.29 D2.C
RESET2  (via drill 0.5 pad 2.18)
  Top 0.813: RESET/2.2 53.98,48.77 v55.5,50.29
  Bottom 0.406: v55.5,50.29 63.54,50.29 D3.C
RESET3  (via drill 0.5 pad 2.18)
  Top 0.813: RESET/3.2 91.82,19.68 v90.3,18.16
  Bottom 0.406: v90.3,18.16 82.25,18.16 D4.C
S$1
  pour Bottom (isolate 1.27): 0.13,-0.13 98.68,-0.13 98.68,72.77 0.13,72.77
S$2
  pour Top (isolate 1.27): 0.13,0.13 97.54,0.13 97.54,72.39 0.13,72.39
SCK
  Top 0.406: 19.05,10.79 19.94,11.68 R6.2
  Top 0.813: JP2.3 19.05,10.79
SCK1
  Top 0.406: 34.54,57.91 33.66,57.02 R8.2
  Top 0.813: JP3.3 34.54,57.91
SCK2
  Top 0.406: 80.14,57.91 79.25,57.02 R14.2
  Top 0.813: JP5.3 80.14,57.91
SCK3
  Top 0.406: 65.66,10.54 66.55,11.43 R20.2
  Top 0.813: JP7.3 65.66,10.54
SCK_PRG
  Top 0.406: IC1.3 38.23,20.57 37.21,19.56 22.48,19.56 20.45,17.53 20.45,16.76 19.94,16.26 R6.1
  Top 0.45: SCK_PRG.2 38.48,27.18 37.72,26.42 37.72,24.51 38.23,24
  Top 0.61: IC1.3 38.23,24
SCK_PRG1
  Top 0.406: IC3.3 15.37,48.13 16.38,49.15 31.11,49.15 33.15,51.18 33.15,51.94 33.66,52.45 R8.1
  Top 0.45: SCK_PRG1.2 15.11,41.53 15.88,42.29 15.88,44.2 15.37,44.7
  Top 0.61: IC3.3 15.37,44.7
SCK_PRG2
  Top 0.406: IC5.3 60.96,48.13 61.98,49.15 76.71,49.15 78.74,51.18 78.74,51.94 79.25,52.45 R14.1
  Top 0.45: SCK_PRG2.2 60.71,41.53 61.47,42.29 61.47,44.2 60.96,44.7
  Top 0.61: IC5.3 60.96,44.7
SCK_PRG3
  Top 0.406: IC7.3 84.84,20.32 83.82,19.3 69.09,19.3 67.06,17.27 67.06,16.51 66.55,16 R20.1
  Top 0.45: SCK_PRG3.2 85.09,26.92 84.33,26.16 84.33,24.26 84.84,23.75
  Top 0.61: IC7.3 84.84,23.75
VCC
  Top 0.254: 35.81,22.91 IC1.5
  Top 0.305: 35.56,11.05 35.56,6.73
  Top 0.406: 9.78,11.96 8.89,11.07 JP2.7
  Top 0.61: 35.81,22.91 35.81,24.13 36.58,24.89 36.58,29.72 35.69,30.6 | IC1.15 34.42,12.19 35.56,11.05
  Top 0.813: 35.56,6.73 34.92,6.1 9.65,6.1 8.89,6.86 JP2.7 8.89,11.05 12.32,14.48 13.21,14.48 14.73,16 14.73,20.95 16.38,22.61 18.41,22.61 19.81,24 22.23,26.42 22.23,28.45 | 35.69,30.6 23.24,30.6 22.23,29.59 22.23,28.45 | 9.78,11.96 9.78,11.94 | IC2.4 22.23,28.45
  Bottom 0.406: 10.54,12.7 12.32,12.7 | 12.32,12.7 17.27,12.7 | 17.27,12.7 26.92,12.7 | R2.2 26.9,12.72 26.92,12.7 | 26.92,12.7 31.37,12.7 32.13,13.46 32.13,19.56 32.89,20.32 32.89,22.99 36.58,26.67 36.58,28.57 37.85,29.84 VCC.2 | R1.1 17.27,12.7 | C5.1 12.29,12.72 12.32,12.7
  Bottom 0.813: JP2.7 8.89,11.05 10.54,12.7
VCC1
  Top 0.254: 17.78,45.8 IC3.5
  Top 0.305: 18.03,57.66 18.03,61.98
  Top 0.406: 43.81,56.74 44.7,57.63 JP3.7
  Top 0.61: 17.78,45.8 17.78,44.58 17.02,43.81 17.02,38.99 17.9,38.11 | IC3.15 19.18,56.52 18.03,57.66
  Top 0.813: 18.03,61.98 18.67,62.61 43.94,62.61 44.7,61.85 JP3.7 44.7,57.66 41.27,54.23 40.39,54.23 38.86,52.7 38.86,47.75 37.21,46.1 35.18,46.1 33.78,44.7 31.37,42.29 31.37,40.26 | 17.9,38.11 30.35,38.11 31.37,39.12 31.37,40.26 | 43.81,56.74 43.81,56.77 | IC4.4 31.37,40.26
  Bottom 0.406: 43.05,56.01 41.27,56.01 | 41.27,56.01 36.32,56.01 | 36.32,56.01 26.67,56.01 | R11.2 26.7,55.98 26.67,56.01 | 26.67,56.01 22.23,56.01 21.46,55.24 21.46,49.15 20.7,48.39 20.7,45.72 17.02,42.04 17.02,40.13 15.75,38.86 VCC1.2 | R4.1 36.32,56.01 | C3.1 41.3,55.98 41.27,56.01
  Bottom 0.813: JP3.7 44.7,57.66 43.05,56.01
VCC2
  Top 0.254: 63.37,45.8 IC5.5
  Top 0.305: 63.63,57.66 63.63,61.98
  Top 0.406: 89.41,56.74 90.3,57.63 JP5.7
  Top 0.61: 63.37,45.8 63.37,44.58 62.61,43.81 62.61,38.99 63.49,38.11 | IC5.15 64.77,56.52 63.63,57.66
  Top 0.813: 63.63,61.98 64.26,62.61 89.53,62.61 90.3,61.85 JP5.7 90.3,57.66 86.87,54.23 85.98,54.23 84.45,52.7 84.45,47.75 82.8,46.1 80.77,46.1 79.38,44.7 76.96,42.29 76.96,40.26 | 63.49,38.11 75.95,38.11 76.96,39.12 76.96,40.26 | 89.41,56.74 89.41,56.77 | IC6.4 76.96,40.26
  Bottom 0.406: 88.65,56.01 86.87,56.01 | 86.87,56.01 81.92,56.01 | 81.92,56.01 72.26,56.01 | R17.2 72.29,55.98 72.26,56.01 | 72.26,56.01 67.82,56.01 67.06,55.24 67.06,49.15 66.29,48.39 66.29,45.72 62.61,42.04 62.61,40.13 61.34,38.86 VCC2.2 | R13.1 81.92,56.01 | C12.1 86.89,55.98 86.87,56.01
  Bottom 0.813: JP5.7 90.3,57.66 88.65,56.01
VCC3
  Top 0.254: 82.42,22.66 IC7.5
  Top 0.305: 82.17,10.79 82.17,6.48
  Top 0.406: 56.39,11.71 55.5,10.82 JP7.7
  Top 0.61: 82.42,22.66 82.42,23.88 83.19,24.64 83.19,29.46 82.3,30.35 | IC7.15 81.03,11.94 82.17,10.79
  Top 0.813: 82.17,6.48 81.53,5.84 56.26,5.84 55.5,6.6 JP7.7 55.5,10.79 58.93,14.22 59.82,14.22 61.34,15.75 61.34,20.7 62.99,22.35 65.02,22.35 66.42,23.75 68.83,26.16 68.83,28.19 | 82.3,30.35 69.85,30.35 68.83,29.33 68.83,28.19 | 56.39,11.71 56.39,11.68 | IC8.4 68.83,28.19
  Bottom 0.406: 57.15,12.45 58.93,12.45 | 58.93,12.45 63.88,12.45 | 63.88,12.45 73.53,12.45 | R23.2 73.51,12.47 73.53,12.45 | 73.53,12.45 77.98,12.45 78.74,13.21 78.74,19.3 79.5,20.07 79.5,22.73 83.19,26.42 83.19,28.32 84.45,29.59 VCC3.2 | R19.1 63.88,12.45 | C17.1 58.9,12.47 58.93,12.45
  Bottom 0.813: JP7.7 55.5,10.79 57.15,12.45
VIN_A
  Bottom 0.406: MB10S-LGE.AC1 9.04,20.24
  Bottom 0.813: 9.04,20.24 X2.2
VIN_A1
  Bottom 0.406: MB10S-LGE1.AC1 44.55,48.47
  Bottom 0.813: 44.55,48.47 X1.2
VIN_A2
  Bottom 0.406: MB10S-LGE2.AC1 90.14,48.47
  Bottom 0.813: 90.14,48.47 X3.2
VIN_A3
  Bottom 0.406: MB10S-LGE3.AC1 55.65,19.99
  Bottom 0.813: 55.65,19.99 X4.2
VIN_B
  Bottom 0.406: MB10S-LGE.AC2 12.54,20.24
  Bottom 0.813: 12.54,20.24 X2.1
VIN_B1
  Bottom 0.406: MB10S-LGE1.AC2 41.05,48.47
  Bottom 0.813: 41.05,48.47 X1.1
VIN_B2
  Bottom 0.406: MB10S-LGE2.AC2 86.64,48.47
  Bottom 0.813: 86.64,48.47 X3.1
VIN_B3
  Bottom 0.406: MB10S-LGE3.AC2 59.15,19.99
  Bottom 0.813: 59.15,19.99 X4.1
VIN_PLUS  (via drill 0.5 pad 1.93)
  Top 0.406: C6.1 11.3,23.77
  Top 0.813: v8.26,28.57 10.69,26.14 11.3,26.14 | 11.3,26.14 IC2.3 | 11.3,23.77 11.3,26.14
  Bottom 0.813: v8.26,28.57 9.65,27.3 MB10S-LGE.+
VIN_PLUS1  (via drill 0.5 pad 1.93)
  Top 0.406: C8.1 42.29,44.93
  Top 0.813: v45.34,40.13 42.9,42.57 42.29,42.57 | 42.29,42.57 IC4.3 | 42.29,44.93 42.29,42.57
  Bottom 0.813: v45.34,40.13 43.94,41.4 MB10S-LGE1.+
VIN_PLUS2  (via drill 0.5 pad 1.93)
  Top 0.406: C13.1 87.88,44.93
  Top 0.813: v90.93,40.13 88.49,42.57 87.88,42.57 | 87.88,42.57 IC6.3 | 87.88,44.93 87.88,42.57
  Bottom 0.813: v90.93,40.13 89.53,41.4 MB10S-LGE2.+
VIN_PLUS3  (via drill 0.5 pad 1.93)
  Top 0.406: C18.1 57.91,23.52
  Top 0.813: v54.86,28.32 57.3,25.88 57.91,25.88 | 57.91,25.88 IC8.3 | 57.91,23.52 57.91,25.88
  Bottom 0.813: v54.86,28.32 56.26,27.05 MB10S-LGE3.+
(copper drawn outside any net)
  shapes: Bottom area x76, Top area x12

## Text on the board
Top: TOP
Bottom: BOTTOM